# Altium PCB EncoderDaughter.PcbDoc
Units mil, origin at the board's own origin, x right, y up, seen from the top; angles counter-clockwise.
Board outline 708.66 x 826.77 mil, 2 copper layers (Top Layer, Bottom Layer); 2 components, 5 nets, 12 pads, 0 vias.
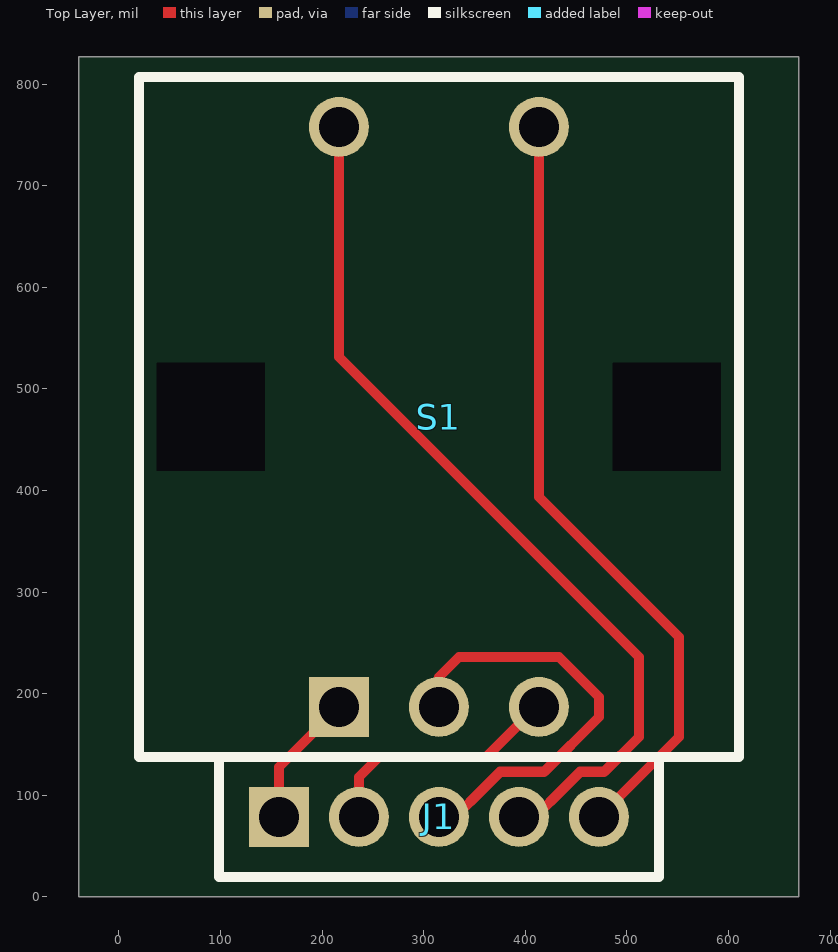
[diagram p0: Top Layer view]
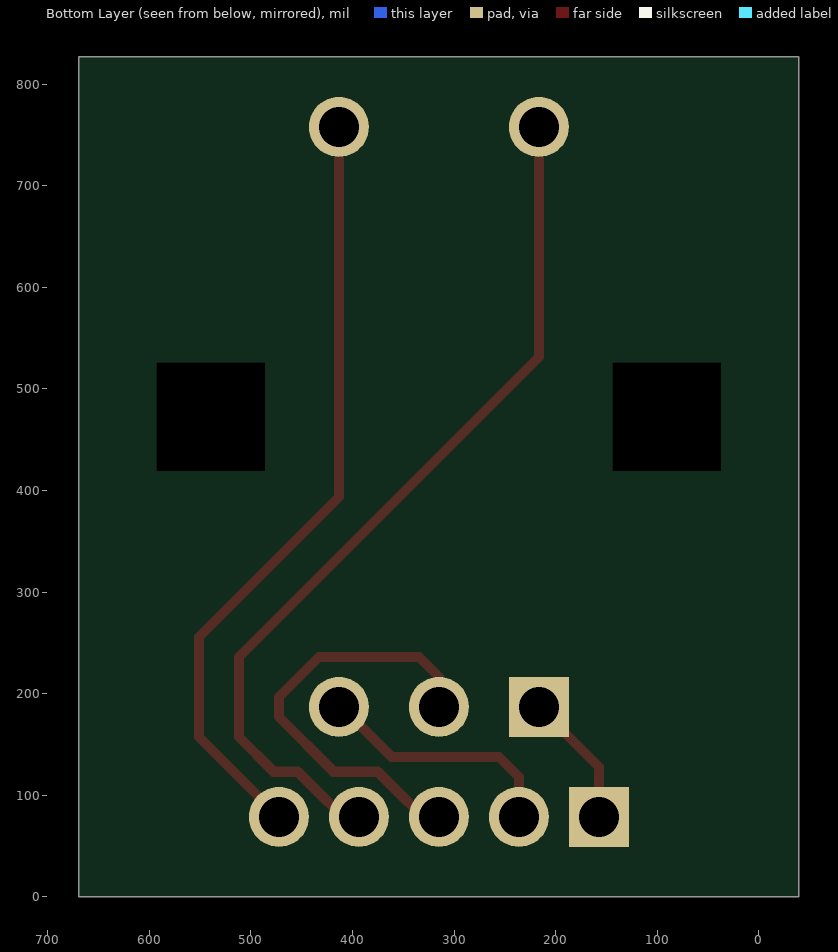
[diagram p1: Bottom Layer view, seen from below]

## Layer stack, top to bottom
Top Solder: solder mask 0.4, Solder Resist, Dk 3.5
Top Layer: signal copper 1.4
Dielectric 1: dielectric 12.6, FR-4, Dk 4.8
Bottom Layer: signal copper 1.4
Bottom Solder: solder mask 0.4, Solder Resist, Dk 3.5

## Board outline
-39.37,0 -39.37,826.77 669.29,826.77 669.29,0

## Design rules (kind name [scope] priority, off if disabled: settings)
Clearance [All] p1: gap=10 ignorepadtopadclearanceinfootprint=FALSE except(0: Arc-Hole Track-Hole SMDPad-Hole THPad-Hole Via-Hole Fill-Hole Poly-Hole Region-Hole Text-Hole)
PolygonConnect [All] p1: connectstyle=Relief reliefconductorwidth=10 reliefentries=4 polygonreliefangle="90 Angle" airgapwidth=10
RoutingVias [All] p1: holewidth=28 width=50 viastyle="Through Hole" minholewidth=28 minwidth=50 maxholewidth=28 maxwidth=50
SolderMaskExpansion [All] p1: expansion=4
Width [All] p1: maxlimit=10 minlimit=10 preferedwidth=10
30 further rules are at their usual default settings.

## Components (designator, comment, footprint, x,y, rotation, side; value= is the part's Value field where it differs from the comment)
J1 "J_RIBBCONN_RIBBCONN" RIBBCONN 314.96,78.74 r0 top
S1 "S_QUADENC_PEC11-4215F-S24" PEC11-4215F-S24 314.96,472.44 r0 top

## Footprints (in the part's own frame and the unit in brackets; to place one, negate y for a bottom-side part, rotate by r counter-clockwise, add the part's x,y. Pads: shape width x height; smd on the part's side, far side on the other; paste and mask are expansions set on the pad)
PEC11-4215F-S24 [mm]
  rect 1.5x1.5 hole 1: 1(-2.5,-7.25)
  round 1.5 hole 1: 2(0,-7.25) 3(2.5,-7.25) 4(-2.5,7.25) 5(2.5,7.25)
  rect 0x0 hole 2.7 square unplated: ""(-5.7,0) ""(5.7,0)
  silkscreen extent -7.5,-8.5 7.5,8.5, body extent -7,-7.45 7,7.45, height 21.6
RIBBCONN [mm]
  rect 1.5x1.5 hole 1: 1(-4,0)
  round 1.5 hole 1: 2(-2,0) 3(0,0) 4(2,0) 5(4,0)
  silkscreen extent -5.5,-1.5 5.5,1.5

## Nets (pads, with @x,y where several pads share a name; then routed paths per layer and width w, separated by ;. In a path a pad name is that pad's centre, name@x,y a point inside that pad or via, vN(x,y) a via of type N, cw(c..) or ccw(c..) an arc to the next point about the centre after c; other vN are vias at no path point)
NetJ1_1: J1.1 S1.1 | length 132.7
  Top Layer w10: J1.1 157.48,127.95 S1.1
NetJ1_2: J1.2 S1.3 | length 245.1
  Top Layer w10: J1.2 236.22,118.11 255.91,137.8 361.5,137.8 410.71,187.01 S1.3
NetJ1_3: J1.3 S1.2 | length 451.7
  Top Layer w10: J1.3 314.96,62.97 375.26,123.27 418.54,123.27 472.44,177.17 472.44,196.85 433.07,236.22 334.65,236.22 314.96,216.54 S1.2
NetJ1_4: J1.4 S1.4 | length 895.7
  Top Layer w10: S1.4 216.54,531.5 511.81,236.22 511.81,157.48 477.6,123.27 454,123.27 393.7,62.97 J1.4
NetJ1_5: J1.5 S1.5 | length 768.8
  Top Layer w10: S1.5 413.39,393.7 551.18,255.91 551.18,157.48 J1.5
pads on no net: S1.